# Altium PCB Touch_1Button_Flex.PcbDoc
Units mm, origin at the board's own origin, x right, y up, seen from the top; angles counter-clockwise.
Board outline 67.8 x 50.5 mm, 2 copper layers (Top Layer, Bottom Layer), stack 0.146 mm thick; 1 components, 1 nets, 6 pads, 0 vias.
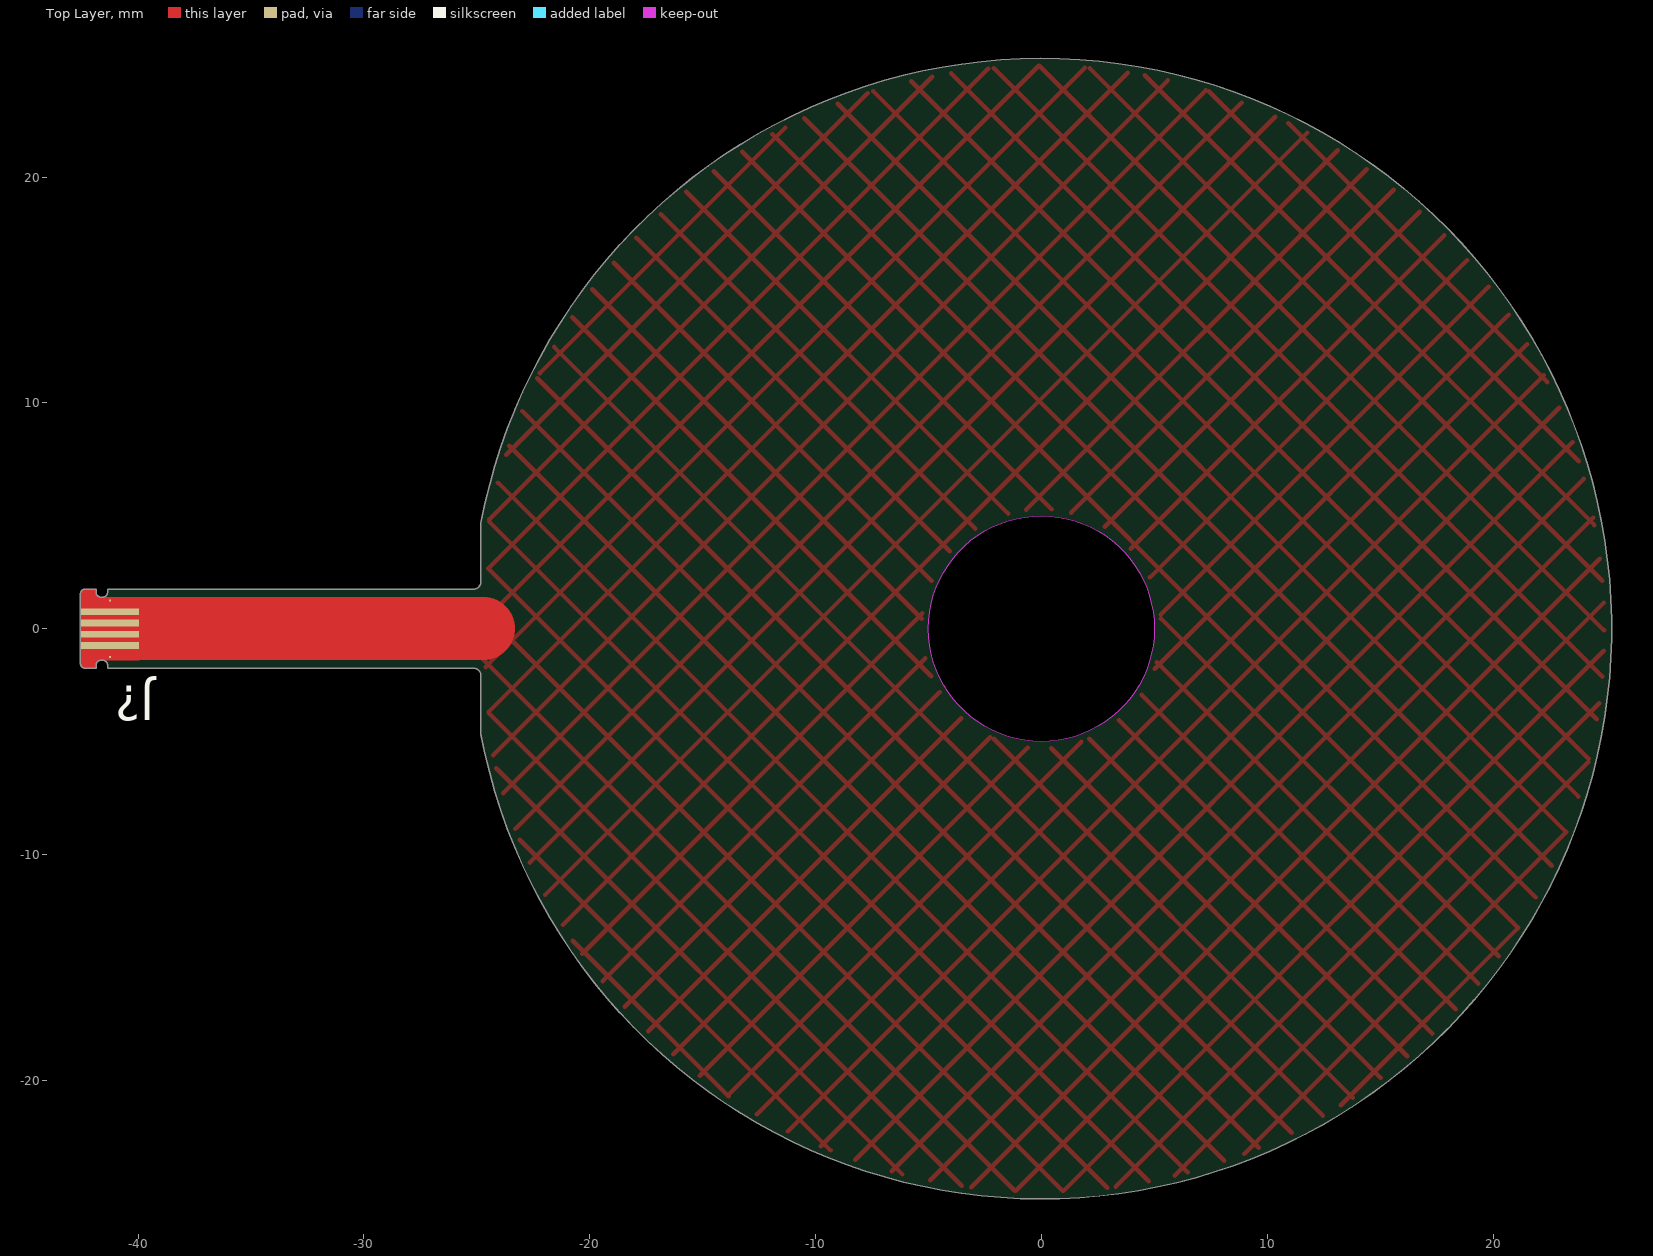
[diagram p0: Top Layer view]
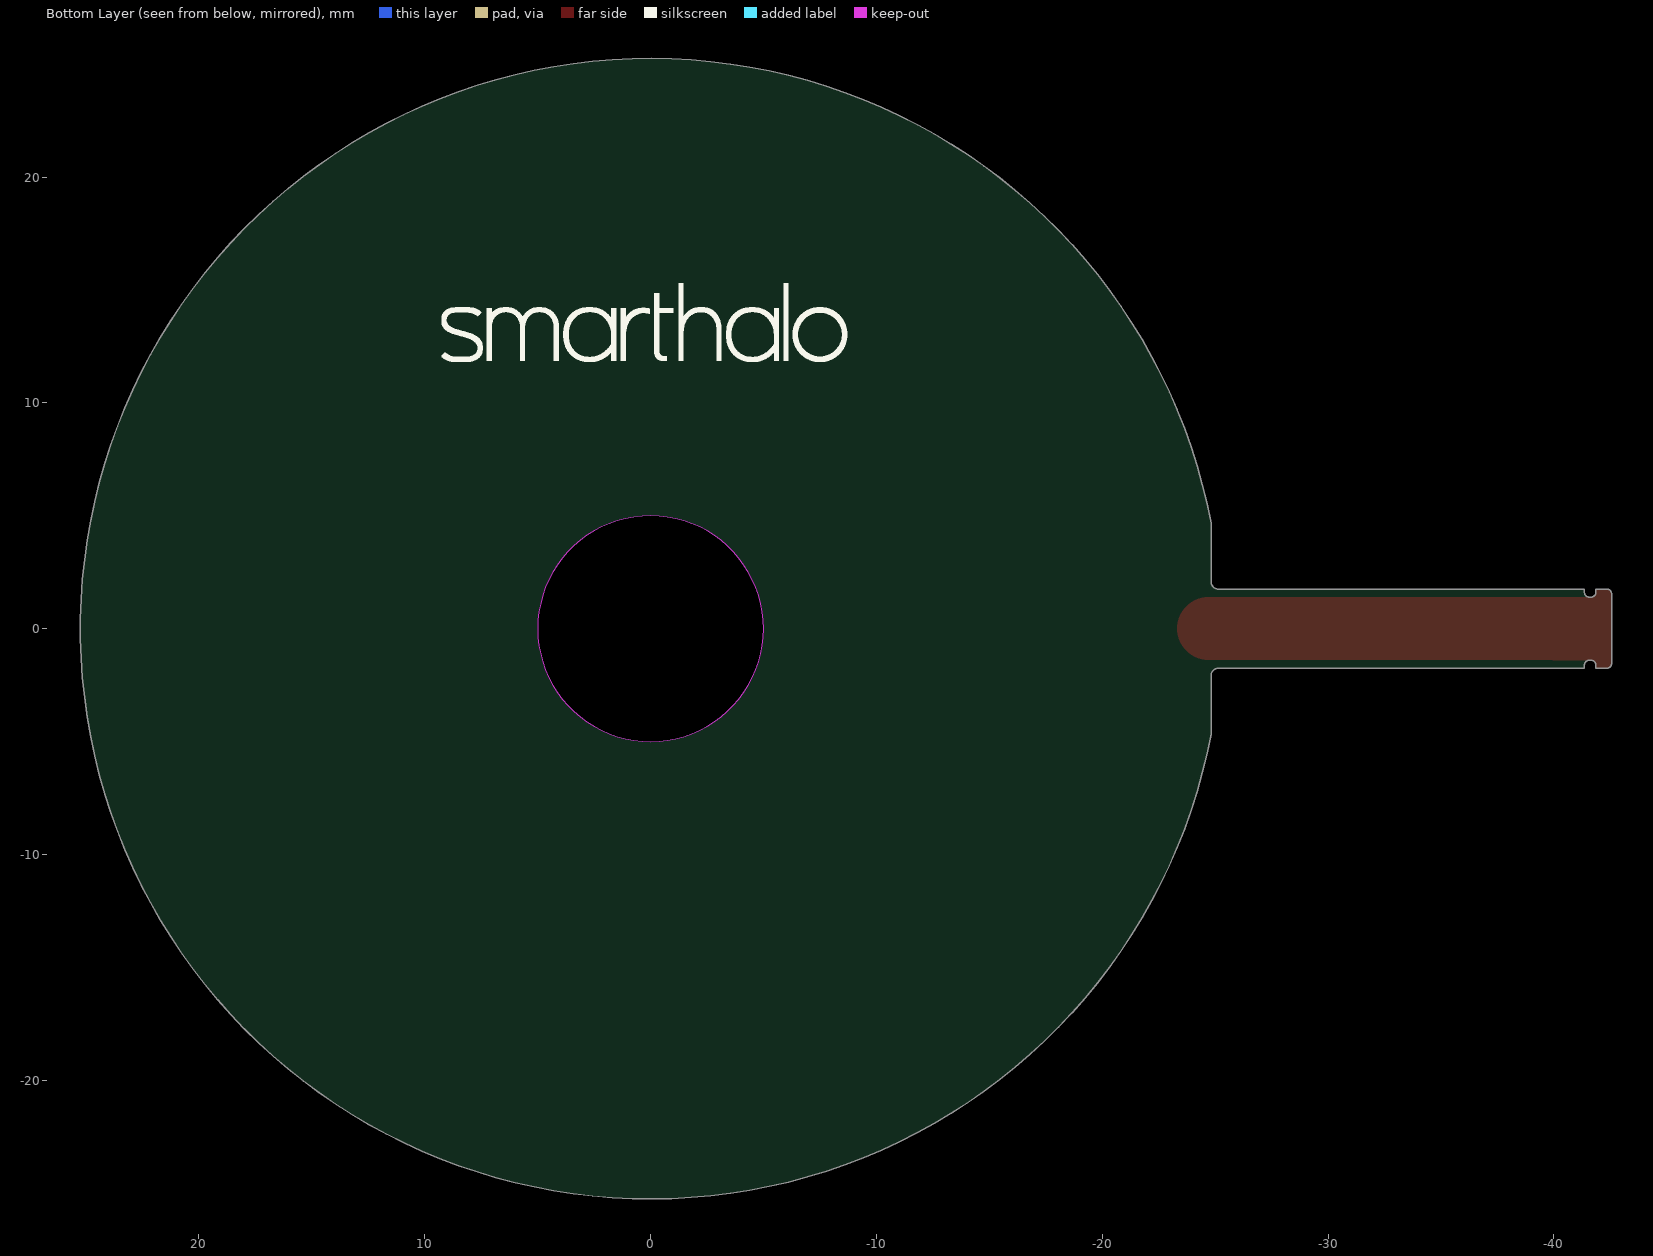
[diagram p1: Bottom Layer view, seen from below]

## Layer stack, top to bottom
Top Layer: signal copper 0.035
Dielectric 1: core 0.0762, Polyimide, Dk 0
Bottom Layer: signal copper 0.035

## Board outline
-42.35,-1.75 cw(c-42.35,-1.55) -42.55,-1.55 -42.55,1.55 cw(c-42.35,1.55) -42.35,1.75 -41.85,1.75 -41.85,1.6 ccw(c-41.65,1.6) -41.65,1.4 -41.55,1.4 ccw(c-41.55,1.6) -41.35,1.6 -41.35,1.75 -25.15,1.75 ccw(c-25.15,2.084) -24.816,2.084 -24.817,4.665 -24.815,4.664 cw(c0,0) -24.815,-4.665 -24.816,-4.665 -24.816,-2.084 ccw(c-25.15,-2.084) -25.15,-1.75 -41.35,-1.75 -41.35,-1.6 ccw(c-41.55,-1.6) -41.55,-1.4 -41.65,-1.4 ccw(c-41.65,-1.6) -41.85,-1.6 -41.85,-1.75
cut-out: 0,-5 cw(c0,0) -5,0 cw(c0,0) 0,5 cw(c0,0) 5,0 cw(c0,0)

## Design rules (kind name [scope] priority, off if disabled: settings)
AcuteAngle [All] p1: minimum=6.00000000000000E+0001 checktracksonly=FALSE
BoardOutlineClearance [All] p1: gap=0.203
Clearance Clearance_CAPIN [InNet('CAPIN') vs InNet('CAPIn')] p1: gap=0
Clearance [All] p2: gap=0.152
FanoutControl Fanout_LCC [IsLCC] p1: bgadir=Out bgaviamode=Centered fanoutstyle=Auto fanoutdirection=Alternating viagrid=0.025 // Fanout_LCC (Default Rule)
FanoutControl Fanout_BGA [IsBGA] p2: bgadir=Out bgaviamode=Centered fanoutstyle=Auto fanoutdirection=Alternating viagrid=0.025 // Fanout_BGA (Default Rule)
FanoutControl Fanout_Default [All] p4: bgadir=Out bgaviamode=Centered fanoutstyle=Auto fanoutdirection=Alternating viagrid=0.025 // Fanout_Default (Default Rule)
FanoutControl Fanout_Small [(CompPinCount < 5)] p5: bgadir=Out bgaviamode=Centered fanoutstyle=Auto fanoutdirection=OutThenIn viagrid=0.025 // Fanout_Small (Default Rule)
Height Height_TOP [OnLayer('Top Layer')] p2: minheight=0 maxheight=3 prefheight=1
Height Height_BOT [OnLayer('Bottom Layer')] p3: minheight=0 maxheight=20 prefheight=3
HoleSize [All] p1: absolutevalues=TRUE maxlimit=2.54 minlimit=0.33 maxpercent=80.000 minpercent=20.000
HoleToHoleClearance [All] p1: gap=0.152 allowstackedmicrovias=TRUE
MinimumAnnularRing [All] p1: minimumring=0.178
MinimumSolderMaskSliver [All] p1: minsoldermaskwidth=0.102
PolygonConnect [All] p1: connectstyle=Direct reliefconductorwidth=0.254 reliefentries=4 polygonreliefangle="90 Angle" airgapwidth=0.254
RoutingVias [All] p1: holewidth=0.33 width=0.686 viastyle="Through Hole" minholewidth=0.33 minwidth=0.686 maxholewidth=0.711 maxwidth=1.27
ShortCircuit ShortCircuit_CAPIN [InNet('CAPIN') vs InNet('CAPIN')] p2: allowed=TRUE
SilkToBoardRegionClearance SilkToBoardRegionClearance_1 [All] p2:
SolderMaskExpansion [All] p1: expansion=0.102
Width Width_VBAT [InNet('VBAT')] p1: maxlimit=1.27 minlimit=0.203 preferedwidth=0.305
Width Width_BATSENSE [InNet('BAT_SENSE')] p2: maxlimit=1.27 minlimit=0.203 preferedwidth=0.305
Width Width_VCC [InNet('VCC')] p3: maxlimit=1.27 minlimit=0.203 preferedwidth=0.305
Width Width_GND [InNet('GND')] p4: maxlimit=0.508 minlimit=0.203 preferedwidth=0.305
Width [All] p5: maxlimit=0.254 minlimit=0.152 preferedwidth=0.203
23 further rules are at their usual default settings.

## Components (designator, comment, footprint, x,y, rotation, side; value= is the part's Value field where it differs from the comment)
J? "FLEX-FCI59453061110ECHLF" FLEX-FCI5945306111CHLF -41.246,0 r180 top

## Footprints (in the part's own frame and the unit in brackets; to place one, negate y for a bottom-side part, rotate by r counter-clockwise, add the part's x,y. Pads: shape width x height; smd on the part's side, far side on the other; paste and mask are expansions set on the pad)
FLEX-FCI5945306111CHLF [mm] "Flex male connector for FCI59453-06111CHLF socket, 6 pins, 2.6 x 0.3 mm pads, 0.5 mm pitch"
  rect 0.1x0.1 smd paste-0.1 mask-0.1: 1(0,1.25) 6(0,-1.25)
  rect 2.6x0.3 smd paste-0.3 mask+0.051: 2(0,0.75) 3(0,0.25) 4(0,-0.25) 5(0,-0.75)
  Top Layer region: -1.3,-1.4 0.4,-1.4 0.4,-1.4 0.477,-1.415 0.541,-1.459 0.585,-1.523 0.6,-1.6 0.6,-1.6 0.6,-1.75 1.1,-1.75 1.177,-1.735 1.241,-1.691 1.285,-1.627 1.3,-1.55 1.3,-1.55 1.3,-1.1 -1.3,-1.1
  Top Layer region: -1.3,1.4 0.4,1.4 0.4,1.4 0.477,1.415 0.541,1.459 0.585,1.523 0.6,1.6 0.6,1.6 0.6,1.75 1.1,1.75 1.177,1.735 1.241,1.691 1.285,1.627 1.3,1.55 1.3,1.55 1.3,1.1 -1.3,1.1
  body extent -2.2,-1.75 1.3,1.75, height 0.2

## Part data
J?: "Flex Connector, to connect to FPC, 0.5 mm pitch, 6 contacts"

## Nets (pads, with @x,y where several pads share a name; then routed paths per layer and width w, separated by ;. In a path a pad name is that pad's centre, name@x,y a point inside that pad or via, vN(x,y) a via of type N, cw(c..) or ccw(c..) an arc to the next point about the centre after c; other vN are vias at no path point)
CAPIN: J?.1 J?.2 J?.3 | length 16.4
  Top Layer w2.794: -41.1,0 -24.7,0
pads on no net: J?.4 J?.5 J?.6

## Polygon pours and split planes (outlines as drawn)
CAPIN on Top Layer "Pour CAPIN" (hatched 45Degree grid 1.5 track 0.2, remove dead copper, pour order 4): 0,-25.25 cw(c0,0) -25.25,0 cw(c0,0) 0,25.25 cw(c0,0) 25.25,0 cw(c0,0)
no net on Mechanical 3 "Stiffener" (solid): -42.35,-1.75 -41.85,-1.75 -41.85,-1.6 cw(c-41.65,-1.6) -41.65,-1.4 -41.55,-1.4 cw(c-41.55,-1.6) -41.35,-1.6 -41.35,-1.75 -38,-1.75 -38,1.75 -41.35,1.75 -41.35,1.6 cw(c-41.55,1.6) -41.55,1.4 -41.65,1.4 cw(c-41.65,1.6) -41.85,1.6 -41.85,1.75 -42.35,1.75 ccw(c-42.35,1.55) -42.55,1.55 -42.55,-1.55 ccw(c-42.35,-1.55)
no net on Mechanical 4 "Adhesive Top 3M467MP" (solid): -24.816,-4.665 -24.817,4.665 -24.815,4.664 cw(c0,-0.002)
no net on Mechanical 5 "Adhesive Bottom 3M467MP" (solid): -24.815,-4.665 -24.817,4.665 -24.815,4.664 cw(c0,0)

## Other copper
Top Layer:
  region net CAPIN: -42.542,-1.4 -39.946,-1.4 -39.946,1.4 -42.542,1.4

## Silkscreen, mask and mechanical layers (free items; w line width, h text height)
Bottom Overlay:
  drawing of 4068 lines, arcs and shapes, not listed
Outline:
  circle w0.1: c0,0 r5
  lines w0.1: -41.35,-1.75 -41.35,-1.6 ccw(c-41.55,-1.6) -41.55,-1.4 -41.65,-1.4 ccw(c-41.65,-1.6) -41.85,-1.6 -41.85,-1.75 -42.35,-1.75 cw(c-42.35,-1.55) -42.55,-1.55 -42.55,1.55 cw(c-42.35,1.55) -42.35,1.75 -41.85,1.75 -41.85,1.6 ccw(c-41.65,1.6) -41.65,1.4 -41.55,1.4 ccw(c-41.55,1.6) -41.35,1.6 -41.35,1.75 ; -41.348,-1.75 -25.15,-1.75 cw(c-25.15,-2.084) -24.816,-2.084 -24.816,-4.665 ; -41.348,1.75 -25.15,1.75 ccw(c-25.15,2.084) -24.816,2.084 -24.817,4.665 ; -24.815,-4.665 ccw(c0,0) -24.815,4.664 cw(c0,0) -24.815,-4.665
Mechanical 3:
  lines w0.1: -41.35,-1.75 -41.35,-1.6 ccw(c-41.55,-1.6) -41.55,-1.4 -41.65,-1.4 ccw(c-41.65,-1.6) -41.85,-1.6 -41.85,-1.75 -42.35,-1.75 cw(c-42.35,-1.55) -42.55,-1.55 -42.55,1.55 cw(c-42.35,1.55) -42.35,1.75 -41.85,1.75 -41.85,1.6 ccw(c-41.65,1.6) -41.65,1.4 -41.55,1.4 ccw(c-41.55,1.6) -41.35,1.6 -41.35,1.75 ; -41.348,-1.75 -39.046,-1.75 -39.046,1.75 -41.348,1.75
Mechanical 4:
  lines w0.1: -24.817,4.665 -24.816,-4.665 ccw(c0,0) -24.815,4.664
Mechanical 5:
  lines w0.1: -24.817,4.665 -24.815,-4.665 ccw(c0,0) -24.815,4.664
Dimensions Top:
  lines w0.254: -27.344,3.27 -26.825,1.75 ; -27.297,-3.278 -26.8,-1.75 ; -27.079,1.748 -26.571,1.752 ; -27.054,-1.752 -26.546,-1.748 ; -26.843,4.29 -26.825,1.75 ; -26.782,-4.29 -26.8,-1.75 ; -26.328,3.278 -26.825,1.75 ; -26.281,-3.27 -26.8,-1.75
  text "3.5 (mm)" at -30.508,5.458 h1.52 r270.41

## Dimensions
0,0 to 21.79,-18.29 on Dimensions Top
-5,0 to 5,0 on Dimensions Top
-42.55,-1.55 to 0,-6 on Dimensions Top